# EAGLE board シュミトトリガ回路横須賀20260829 (EAGLE 9.7.0)
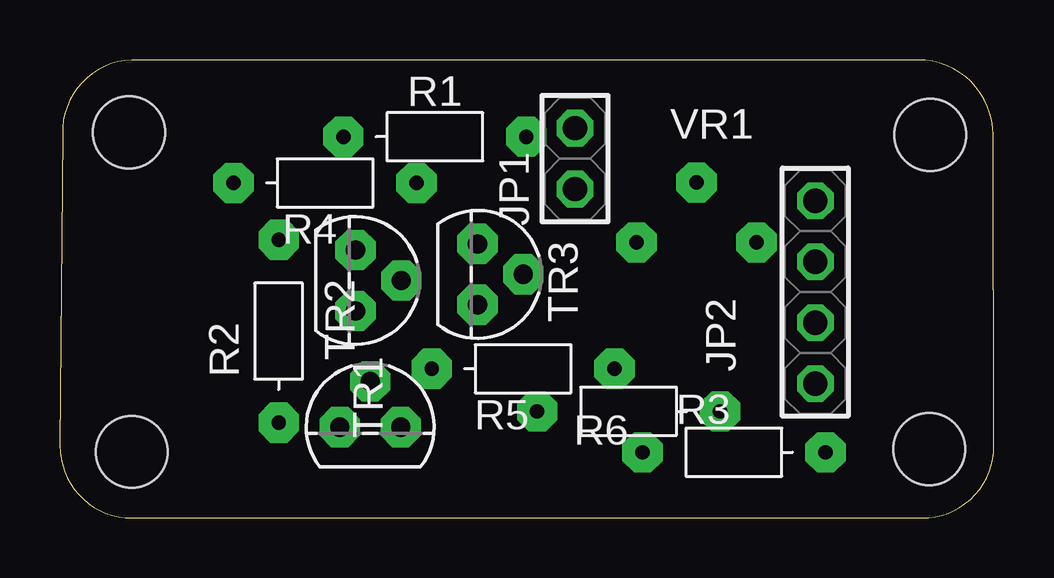
[diagram p0: board, top side]
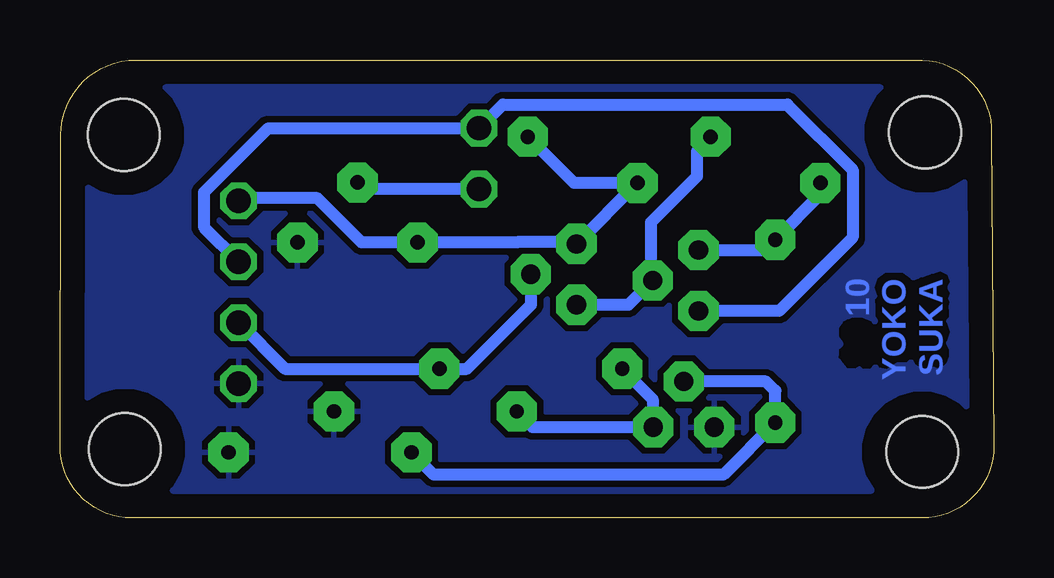
[diagram p1: board, bottom side, seen from below]

Size 38.92 x 19.1 mm. Coordinates in mm from the lower left corner, seen from the top.
Outline: 3,0 35.92,0 arc90 38.92,3.01 38.88,15.98 arc90 35.75,19.1 2.98,19.1 arc90 0.11,16 0,3.02 arc90 3,0
Copper layers (1*16): Top / Bottom
Stack-up Default Layer Stack: Top User Defined 0.035mm / Dielectric-1 User Defined 1.5mm / Bottom User Defined 0.035mm
Design rules: minimum copper width 10mil, minimum drill size 0.35mm, copper clearance wire_polygon to wire_polygon 10mil, copper clearance wire_polygon to pad_smd 10mil, copper clearance wire_polygon to via 10mil, copper clearance pad_smd to pad_smd 10mil, copper clearance pad_smd to via 10mil, copper clearance via to via 10mil, copper clearance smd to pad (same net) 10mil, copper clearance smd to via (same net) 10mil, copper clearance smd to smd (same net) 10mil, dimension clearance 40mil, via restrict clearance 0mil, restrict clearance 0mil, drill distance 10mil, keepout clearance 0mil
Holes 3 mm at 2.88,16.08 2.99,2.76 36.26,15.97 36.22,2.87

## Footprints (pad centres in the part's own frame; a part is rotated, then mirrored left to right if it is on the bottom)
1X02 = drill 1.016 octagon: 1 -1.27,0; 2 1.27,0
1X04 = drill 1.016 octagon: 1 -3.81,0; 2 -1.27,0; 3 1.27,0; 4 3.81,0
AXIAL_PITCH300MIL = drill 0.6 pad 1.676 octagon: 1 -3.81,0; 2 3.81,0
TO92(ECB) = drill 0.8 pad 1.676 octagon: B 1.27,0; C 0,1.905; E -1.27,0
GF063P = drill 0.6 pad 1.676 octagon: 1 -2.5,-0.5; 2 0,2; 3 2.5,-0.5

## Placement (x,y rotation side)
JP1  PINHD-1X2  [1X02]  21.46,14.99 90 top
JP2  PINHD-1X4  [1X04]  31.47,9.42 270 top
R1  10k  [AXIAL_PITCH300MIL]  15.62,15.9 0 top
R2  300  [AXIAL_PITCH300MIL]  9.11,7.79 90 top
R3  1.6k  [AXIAL_PITCH300MIL]  28.08,2.74 180 top
R4  3k  [AXIAL_PITCH300MIL]  11.04,13.97 0 top
R5  2k  [AXIAL_PITCH300MIL]  19.3,6.22 0 top
R6  2k  [AXIAL_PITCH300MIL]  23.69,4.45 180 top
TR1  NPNTO92(ECB)  [TO92(ECB)]  12.31,9.91 270 top
TR2  NPNTO92(ECB)  [TO92(ECB)]  12.92,3.78 0 top
TR3  PNPTO-92  [TO92(ECB)]  17.39,10.16 270 top
VR1  10k  [GF063P]  26.52,11.99 0 top

## Library data of the parts
JP1 = Connector; CATEGORY_L1: Connectors; CATEGORY_L2: Headers; CATEGORY_L3: Male Pins; DESCRIPTION: Header-Straight-2 Position; PACKAGE: Through Hole; PITCH: 0.100" (2.54mm)
JP2 = Connector; CATEGORY_L1: Connectors; CATEGORY_L2: Headers; CATEGORY_L3: Male Pins; DESCRIPTION: Header-Straight-4 Position; PACKAGE: Through Hole; PITCH: 0.100" (2.54mm)
R1-R6 = resistor
TR1-TR3 = transistor
VR1 = potenshonmeter

## Nets
+3.3V: JP2.1 R1.2 R4.2 TR3.E VR1.1
GND: JP2.4 R3.1 R6.1 TR2.E VR1.3
IN: JP1.2 JP2.2 TR1.B
N$1: R1.1 TR1.C TR3.B
N$2: R2.2 R4.1 TR1.E
N$3: JP1.1 VR1.2
N$6: R2.1 R3.2 TR2.C
N$8: R5.1 R6.2 TR2.B
OUT: JP2.3 R5.2 TR3.C

## Tracks (layer width: path | path; a pad name or v marks a point on that pad's centre or on a via)
+3.3V
  Bottom 0.508: R1.2 17.49,13.97 R4.2 TR3.E 17.47,11.51 19.86,11.51 19.87,11.49 VR1.1 26.34,11.49 28.19,13.34 31.36,13.34 JP2.1
GND
  pour Bottom: 40.89,20.95 40.89,0 -1.66,0 -1.66,20.95
IN
  Bottom 0.508: JP2.2 32.92,12.13 32.92,13.58 30.24,16.26 JP1.2 20.47,17.25 8.61,17.25 5.89,14.53 5.89,11.7 8.95,8.64 TR1.B
N$1
  Bottom 0.508: TR3.B 15.23,8.89 TR1.C 14.29,9.98 14.29,12.32 12.37,14.25 12.37,15.29 11.81,15.85 R1.1
N$2
  Bottom 0.508: TR1.E 9.54,11.18 R2.2 7.23,13.48 R4.1
N$3
  Bottom 0.508: VR1.2 26.25,13.72 JP1.1
N$6
  Bottom 0.508: TR2.C 9.5,5.69 9.11,5.3 R2.1 11.29,1.8 23.34,1.8 R3.2
N$8
  Bottom 0.508: TR2.B 14.22,3.78 | 14.22,3.78 19.22,3.78 R6.2 | R5.1 14.22,4.95 14.22,3.78
OUT
  Bottom 0.508: JP2.3 29.55,6.22 R5.2 21.97,6.22 19.3,8.89 TR3.C

## Text on the board
Bottom: 10 / YOKO / SUKA